# EAGLE board 08E-005 (EAGLE 9.6.2)
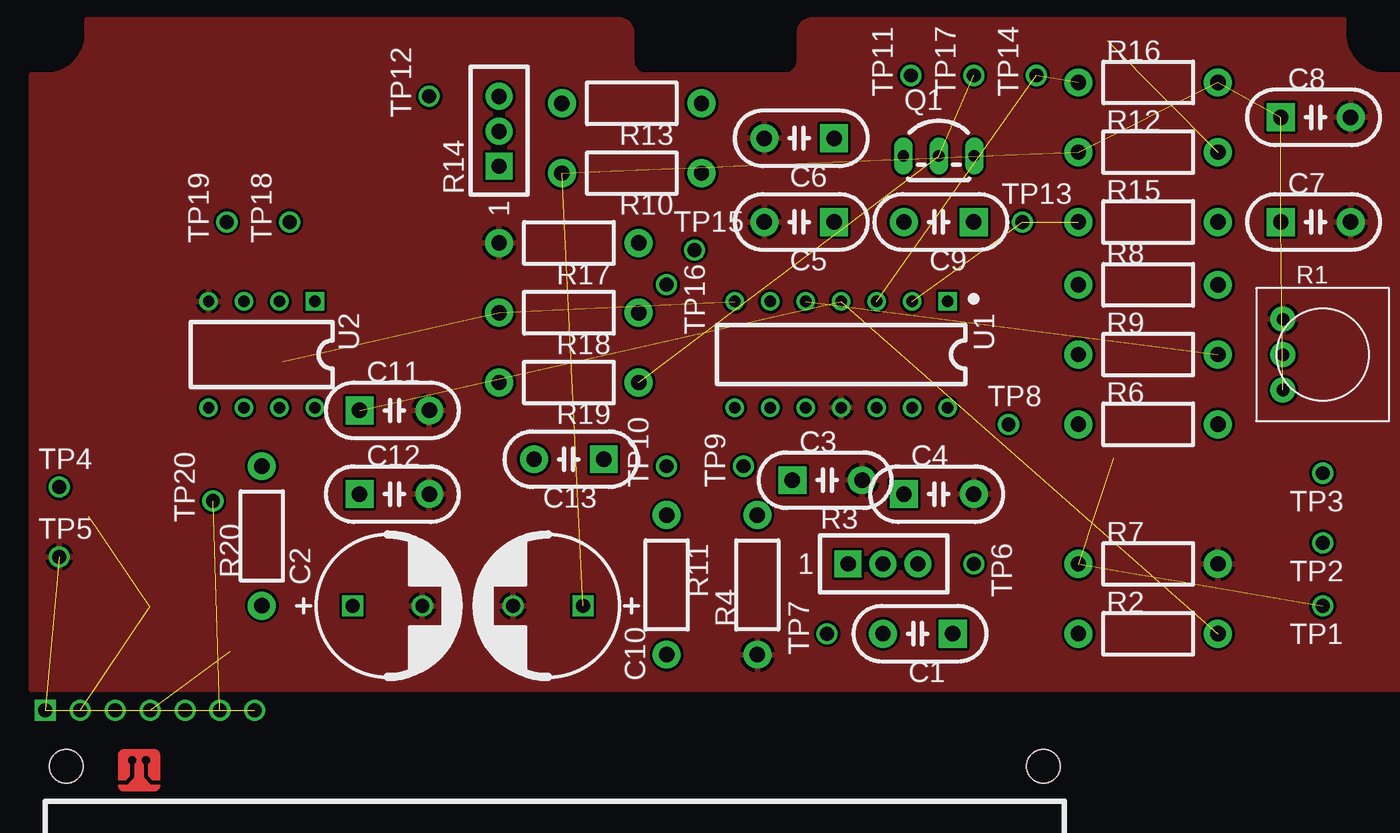
[diagram p0: board, top side]
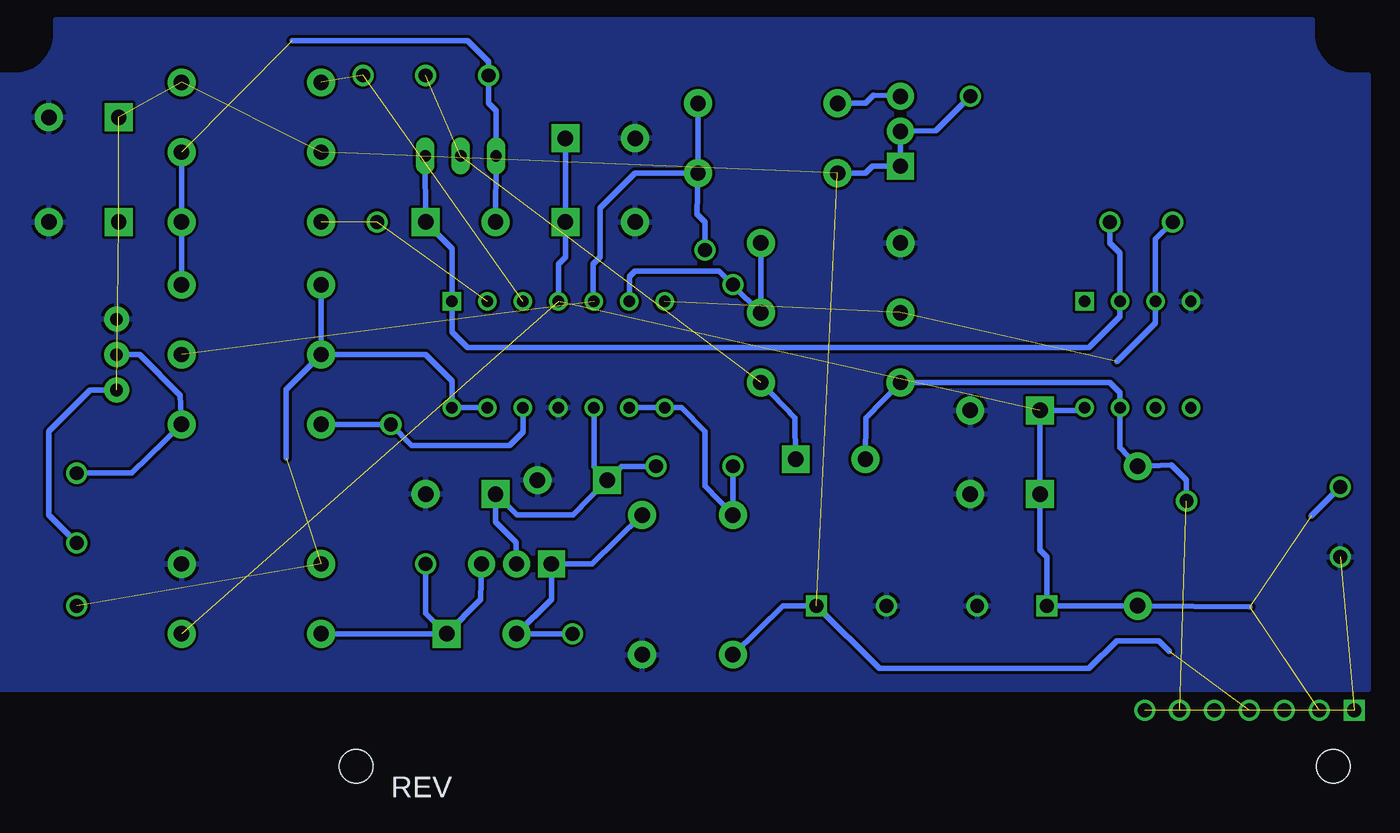
[diagram p1: board, bottom side, seen from below]

No outline drawn. Coordinates in mm, seen from the top.
Copper layers (1*16): Top 0.035mm / dielectric 1.5mm / Bottom 0.035mm
Design rules "minipcb": minimum track width 10mil, minimum drill 24mil, track to track 8mil, track to pad 8mil, pad to pad 8mil, via to via 8mil, smd to smd 8mil, copper to edge 40mil, drill to drill 8mil, minimum pad ring 10mil, minimum via ring 8mil, stop-mask expansion 4mil, vias tented up to drill 20mil, thermal gap 10mil

## Footprints (pad centres in the part's own frame; a part is rotated, then mirrored left to right if it is on the bottom)
C050-024X044 = drill 1.1 pad 2 square: 1 -2.5,0 | drill 1.1 pad 2: 2 2.5,0
C5MM = drill 1 square: + -2.5,0 | drill 1: - 2.5,0
PINS_1X7 = drill 1 square: 1 0,0 | drill 1: 2 2.5,0; 3 5,0; 4 7.5,0; 5 10,0; 6 12.5,0; 7 15,0
MINIPCB_0P_50X75 = hole 2.4: 72.5,47.5; 2.5,47.5
TO92-EBC-OVAL = drill 0.813 long: B 0,-1.27; C 2.54,-1.27; E -2.54,-1.27
TRIM-3386 = drill 0.9 pad 1.778: 1 -2.54,-2.857; 2 0,-2.857; 3 2.54,-2.857
0207/10 = drill 1.1 pad 2: 1 -5,0; 2 5,0
TRIM_0100 = drill 1.1 pad 1.93 square: 1 0,0 | drill 1.1 pad 1.93: 2 2.5,0; 3 5,0
PINS_1_TESTPOINT_KE5000_NOTEXT = drill 1: 1 0,0
DIL14 = drill 0.813 square: 1 -7.62,-3.81 | drill 0.813: 2 -5.08,-3.81; 3 -2.54,-3.81; 4 0,-3.81; 5 2.54,-3.81; 6 5.08,-3.81; 7 7.62,-3.81; 8 7.62,3.81; 9 5.08,3.81; 10 2.54,3.81; 11 0,3.81; 12 -2.54,3.81; 13 -5.08,3.81; 14 -7.62,3.81
DIL08 = drill 0.813 square: 1 -3.81,-3.81 | drill 0.813: 2 -1.27,-3.81; 3 1.27,-3.81; 4 3.81,-3.81; 5 3.81,3.81; 6 1.27,3.81; 7 -1.27,3.81; 8 -3.81,3.81

## Placement (x,y rotation side)
C1  [C050-024X044]  64.5,5 180 top
C2  [C5MM]  26.5,7 0 top
C3  [C050-024X044]  58,16 0 top
C4  [C050-024X044]  66,15 0 top
C5  [C050-024X044]  56,34.5 180 top
C6  [C050-024X044]  56,40.5 180 top
C7  [C050-024X044]  93,34.5 0 top
C8  [C050-024X044]  93,42 0 top
C9  [C050-024X044]  66,34.5 180 top
C10  [C5MM]  38,7 180 top
C11  [C050-024X044]  27,21 0 top
C12  [C050-024X044]  27,15 0 top
C13  [C050-024X044]  39.5,17.5 180 top
P1  [PINS_1X7]  2,-0.5 0 top
PCB1  POWER  [MINIPCB_0P_50X75]  1,-52 0 top
Q1  [TO92-EBC-OVAL]  66,40.5 0 top
R1  [TRIM-3386]  93.5,25 270 top
R2  [0207/10]  81,5 0 top
R3  [TRIM_0100]  59.5,10 0 top
R4  [0207/10]  53,8.5 90 top
R6  [0207/10]  81,20 0 top
R7  [0207/10]  81,10 0 top
R8  [0207/10]  81,30 0 top
R9  [0207/10]  81,25 0 top
R10  [0207/10]  44,38 180 top
R11  [0207/10]  46.5,8.5 270 top
R12  [0207/10]  81,39.5 0 top
R13  [0207/10]  44,43 180 top
R14  [TRIM_0100]  34.5,38.5 90 top
R15  [0207/10]  81,34.5 0 top
R16  [0207/10]  81,44.5 0 top
R17  [0207/10]  39.5,33 180 top
R18  [0207/10]  39.5,28 180 top
R19  [0207/10]  39.5,23 180 top
R20  [0207/10]  17.5,12 90 top
TP1  [PINS_1_TESTPOINT_KE5000_NOTEXT]  93.5,7 180 top
TP2  [PINS_1_TESTPOINT_KE5000_NOTEXT]  93.5,11.5 180 top
TP3  [PINS_1_TESTPOINT_KE5000_NOTEXT]  93.5,16.5 180 top
TP4  [PINS_1_TESTPOINT_KE5000_NOTEXT]  3,15.5 0 top
TP5  [PINS_1_TESTPOINT_KE5000_NOTEXT]  3,10.5 0 top
TP6  [PINS_1_TESTPOINT_KE5000_NOTEXT]  68.5,10 270 top
TP7  [PINS_1_TESTPOINT_KE5000_NOTEXT]  58,5 90 top
TP8  [PINS_1_TESTPOINT_KE5000_NOTEXT]  71,20 0 top
TP9  [PINS_1_TESTPOINT_KE5000_NOTEXT]  52,17 90 top
TP10  [PINS_1_TESTPOINT_KE5000_NOTEXT]  46.5,17 90 top
TP11  [PINS_1_TESTPOINT_KE5000_NOTEXT]  64,45 90 top
TP12  [PINS_1_TESTPOINT_KE5000_NOTEXT]  29.5,43.5 90 top
TP13  [PINS_1_TESTPOINT_KE5000_NOTEXT]  72,34.5 0 top
TP14  [PINS_1_TESTPOINT_KE5000_NOTEXT]  73,45 90 top
TP15  [PINS_1_TESTPOINT_KE5000_NOTEXT]  48.5,32.5 0 top
TP16  [PINS_1_TESTPOINT_KE5000_NOTEXT]  46.5,30 270 top
TP17  [PINS_1_TESTPOINT_KE5000_NOTEXT]  68.5,45 90 top
TP18  [PINS_1_TESTPOINT_KE5000_NOTEXT]  19.5,34.5 90 top
TP19  [PINS_1_TESTPOINT_KE5000_NOTEXT]  15,34.5 90 top
TP20  [PINS_1_TESTPOINT_KE5000_NOTEXT]  14,14.5 90 top
U1  [DIL14]  59,25 180 top
U2  [DIL08]  17.5,25 180 top

## Library data of the parts
C1-C13 P1 Q1 R1-R4 R6-R20 TP1-TP20 U1 U2 = minipcb
PCB1 = minipcb; CIRCUIT_CATEGORY: CIRCUIT CATEGORY; REVISION: A1; TITLE: TITLE

## Nets
BIAS: C3.1 C4.1 R3.2 TP9.1 U1.10
GND: C2.- C3.2 C4.2 C5.2 C6.2 C7.2 C8.2 C10.- C11.2 C12.2 P1.1 P1.5 P1.7 R1.1 R4.1 R7.2 R17.2 TP5.1 U1.11 U2.4
N$2: R16.1 TP14.1 U1.3
N$3: R15.1 TP13.1 U1.2
N$4: R7.1 R8.1 R9.1 TP1.1 U1.13 U1.14
N$5: C9.2 Q1.E R8.2 R12.2 R15.2 TP11.1
N$6: C13.2 P1.6 R19.2 R20.2 TP20.1 U2.7
N$7: C9.1 Q1.C TP18.1 U1.1 U2.2
N$8: C13.1 Q1.B R19.1 TP17.1
N$9: R11.1 TP10.1 U1.8 U1.9
N$10: R17.1 R18.1 TP16.1 U1.6
N$11: R18.2 TP19.1 U1.7 U2.3
N$12: R6.1 TP8.1 U1.12
N$13: R1.2 R6.2 TP3.1
N$15: R9.2 R10.1 R13.1 TP15.1 U1.5
N$19: R13.2 R14.3
NC: P1.3
POT.1: C1.2 R3.1 R4.2 TP7.1
POT.3: C1.1 R2.1 R3.3 TP6.1
V+: C2.+ C5.1 C6.1 C11.1 C12.1 P1.2 R2.2 R20.1 TP4.1 U1.4 U2.8
VREF: C7.1 C8.1 C10.+ P1.4 R1.3 R10.2 R11.2 R12.1 R14.1 R14.2 R16.2 TP2.1 TP12.1

## Tracks (layer width: path | path; a pad name or v marks a point on that pad's centre or on a via)
BIAS
  Bottom 0.406: U1.10 56.46,17 C3.1 | C3.1 57.96,13.5 61.96,13.5 C4.1 63.5,14.96 63.5,13 62.04,11.54 R3.2 | TP9.1 54.46,17 C3.1
GND  (3 unrouted)
  pour Bottom: 1,1 99,1 99,45 98,45 arc-90 95,48 95,49 5,49 5,48 arc-90 2,45 1,45
  pour Top: 1,1 99,1 99,45 98,45 arc-90 95,48 95,49 57,49 arc90 56,48 56,46 arc-90 55,45 45,45 arc-90 44,46 44,48 arc90 43,49 5,49 5,48 arc-90 2,45 1,45
N$2  (2 unrouted)
N$3  (2 unrouted)
N$4  (2 unrouted)
  Bottom 0.406: 78.5,17.58 78.5,22.5 R9.1 | R8.1 R9.1 | R9.1 68.5,25 66.62,23.12 U1.14 U1.13
N$5  (1 unrouted)
  Bottom 0.406: R8.2 R15.2 R12.2 | 78.08,47.5 65.5,47.5 64,46 TP11.1 64,43 63.46,42.46 Q1.E C9.2
N$6  (1 unrouted)
  Bottom 0.406: C13.2 36.96,20.46 R19.2 19.5,23 18.77,22.27 U2.7 18.77,18.35 R20.2 15.08,17.08 14,16 TP20.1
N$7
  Bottom 0.406: TP18.1 19.5,33 18.77,32.27 U2.2 18.77,27.73 21,25.5 65.5,25.5 66.62,26.62 U1.1 66.62,32.58 C9.1 Q1.C
N$8  (2 unrouted)
  Bottom 0.406: C13.1 42.04,20.46 R19.1
N$9
  Bottom 0.406: U1.9 U1.8 50.19,21.19 48.5,19.5 48.5,15.58 R11.1 TP10.1
N$10
  Bottom 0.406: R17.1 R18.1 46.5,29.92 TP16.1 47.5,31 53.5,31 53.92,30.58 U1.6
N$11  (2 unrouted)
  Bottom 0.406: TP19.1 16.23,33.27 U2.3 16.23,27.27 19,24.5
N$12
  Bottom 0.406: U1.12 61.54,19.46 62.5,18.5 69.5,18.5 TP8.1 R6.1
N$13
  Bottom 0.406: TP3.1 89.58,16.5 R6.2 86.08,22.08 89,25 R1.2
N$15  (1 unrouted)
  Bottom 0.406: R13.1 R10.1 | R10.1 53.5,38 56,35.5 56,32 56.5,31.5 56.5,28.85 U1.5 | TP15.1 48.5,34.5 49.08,35.08 R10.1
N$19
  Bottom 0.406: R14.3 36.42,43.58 37,43 R13.2
POT.1
  Bottom 0.406: TP7.1 C1.2 59.5,7.46 R3.1 56.58,10 R4.2
POT.3
  Bottom 0.406: R2.1 C1.1 | C1.1 68.5,6.46 TP6.1 | R3.3 64.58,7.46 C1.1
V+  (4 unrouted)
  Bottom 0.406: 5.08,13.42 TP4.1 | 9.46,6.92 R20.1 17.58,7 C2.+ 24,10.5 24.5,11 24.5,14.96 C12.1 C11.1 21.5,21 U2.8 | C6.1 C5.1 58.5,34.46 58.5,32 59,31.5 U1.4
VREF  (7 unrouted)
  Bottom 0.406: 15.24,3.74 16,4.5 19,4.5 21,2.5 36,2.5 C10.+ 42.92,7 R11.2 | TP12.1 31.96,41.04 R14.2 R14.1 36.5,38.5 37,38 R10.2 | R1.3 92.54,22.46 95.5,19.5 95.5,13.5 TP2.1